# EAGLE board StepDrv (EAGLE 7.2.0)
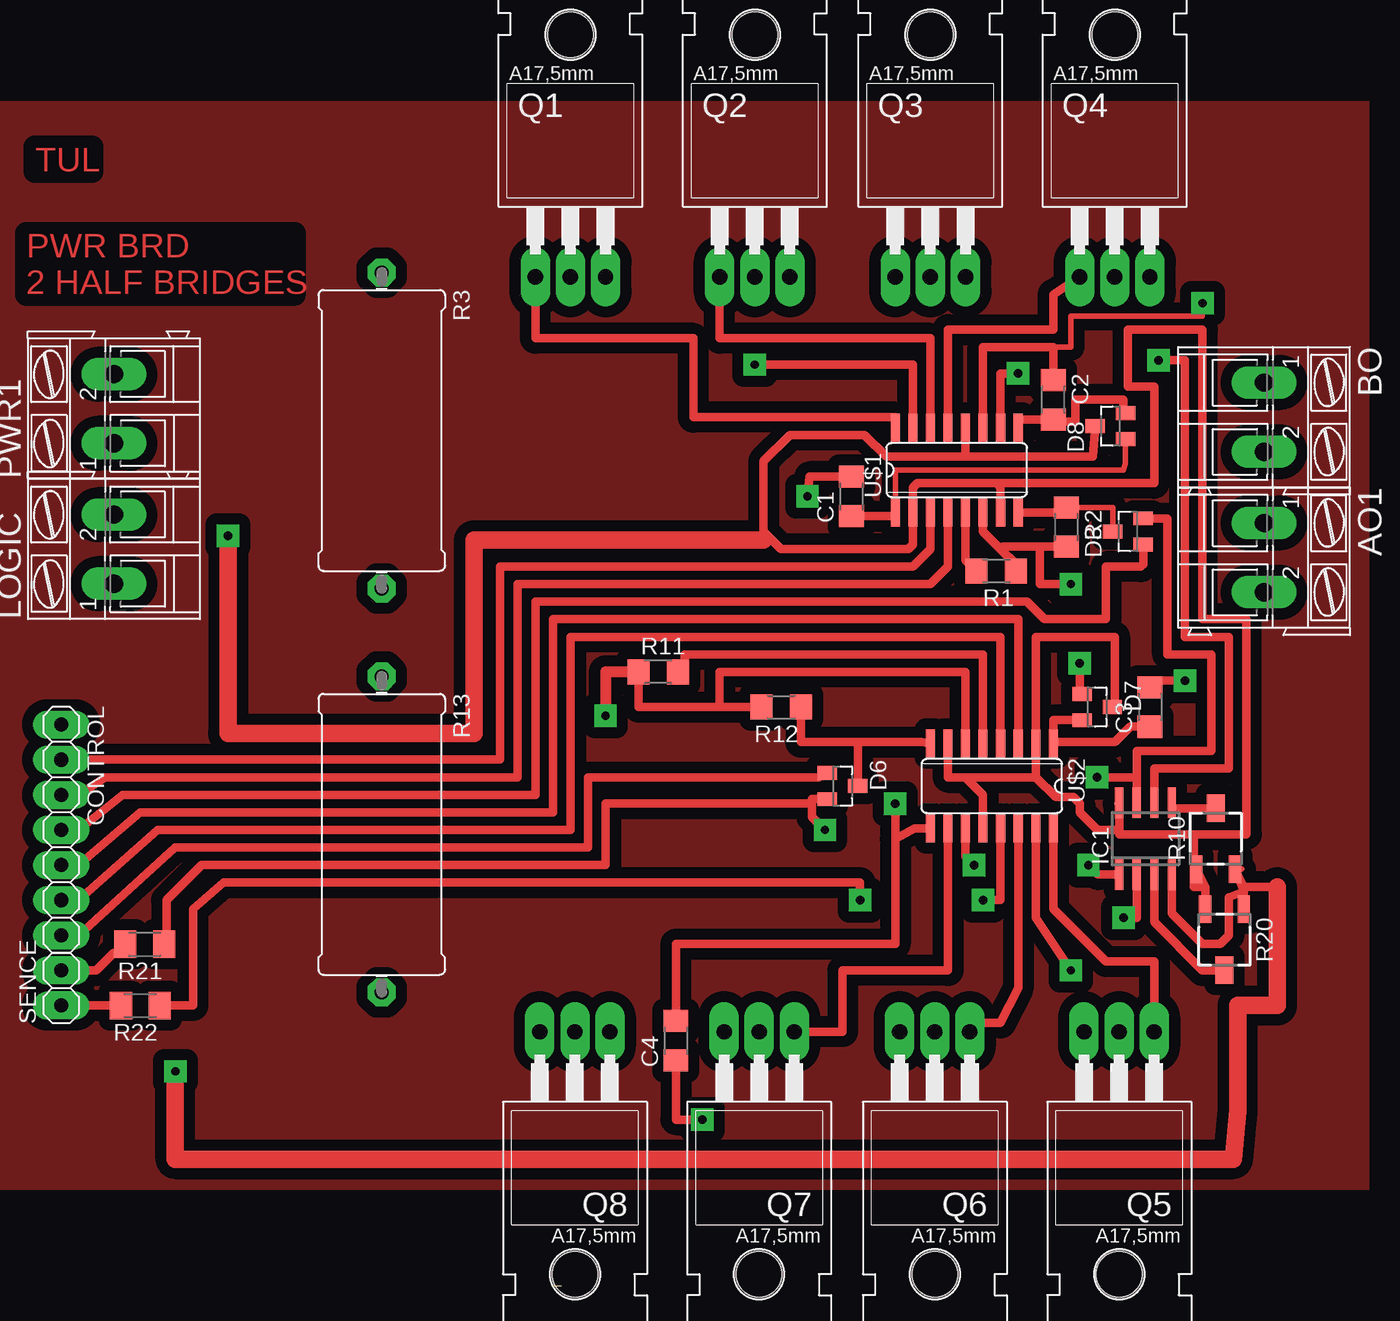
[diagram p0: board, top side]
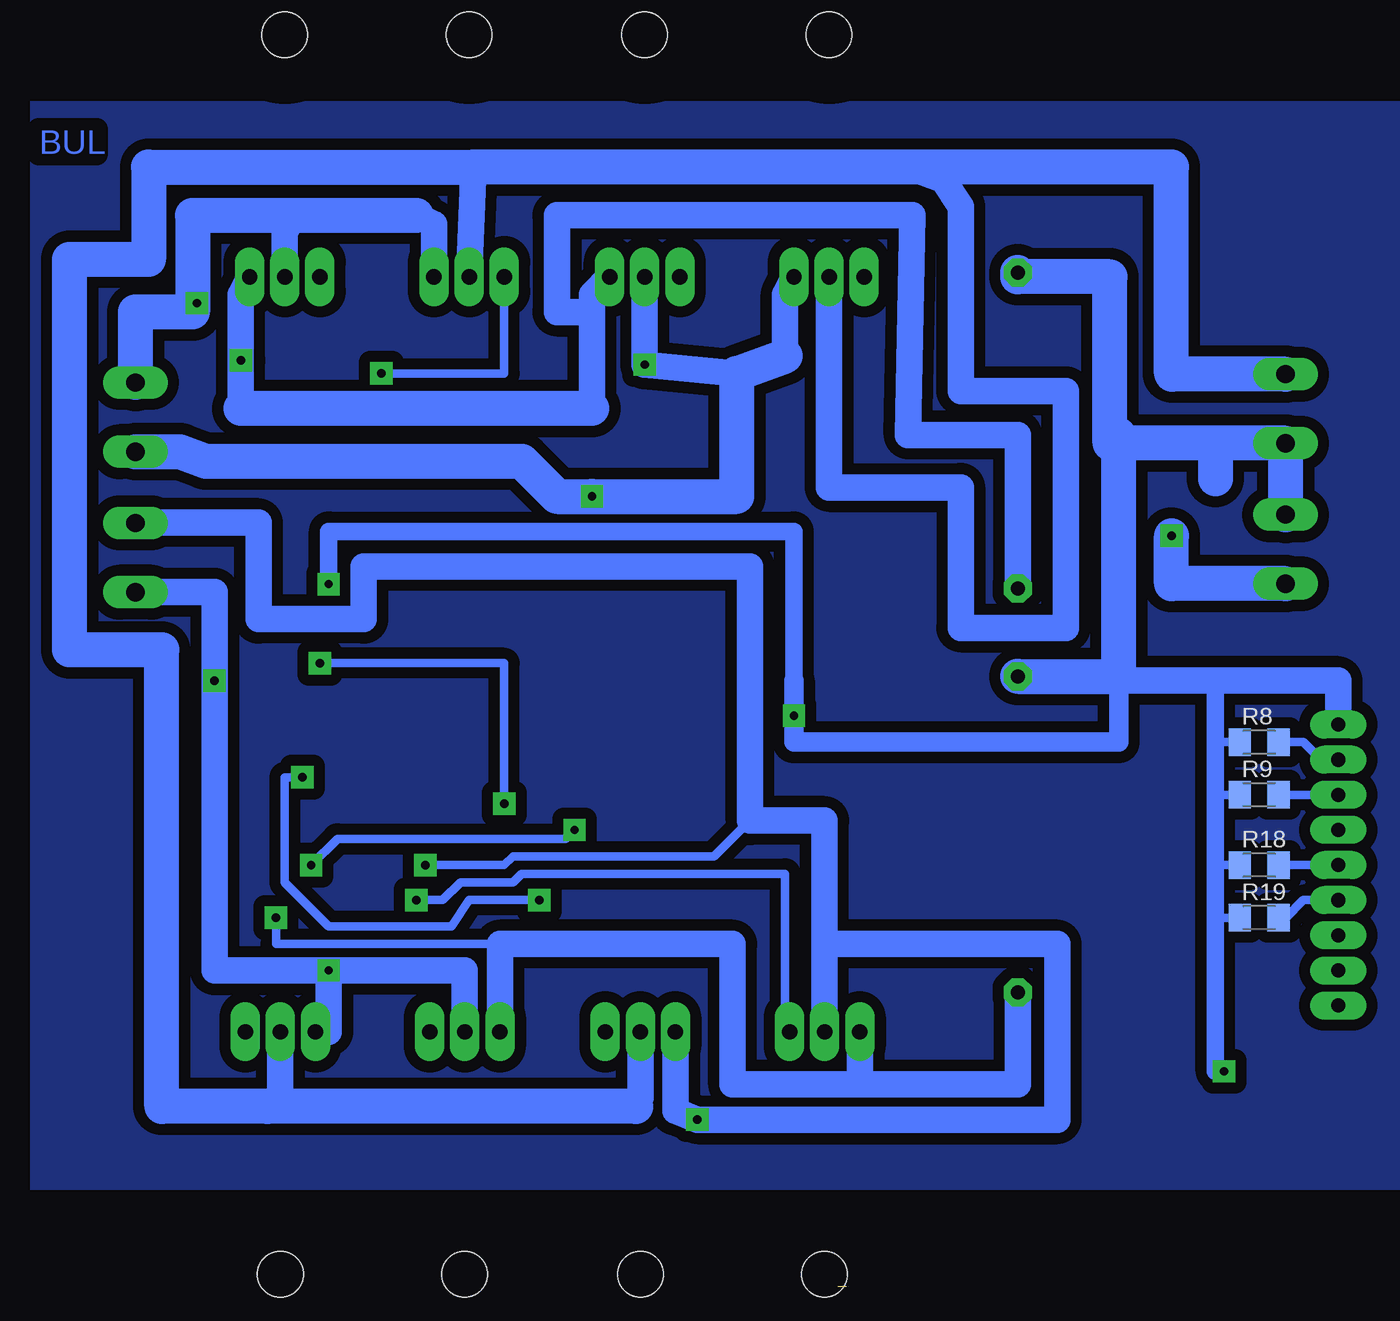
[diagram p1: board, bottom side, seen from below]

Size 0.63 x 0 mm. Coordinates in mm from the lower left corner, seen from the top.
Outline: 0.63,0 0,0
Copper layers (1*16): Top 0.035mm / dielectric 1.5mm / Bottom 0.035mm
Design rules "default *": minimum track width 10mil, minimum drill 24mil, track to track 8mil, track to pad 8mil, pad to pad 8mil, via to via 8mil, smd to smd 8mil, copper to edge 40mil, drill to drill 8mil, minimum pad ring 20mil, minimum via ring 20mil, stop-mask expansion 4mil, vias tented up to drill 0mil, thermal gap 10mil

## Footprints (pad centres in the part's own frame; a part is rotated, then mirrored left to right if it is on the bottom)
AK300/2 = drill 1.321 long: 1 -2.515,0; 2 2.489,0
C1206 = smd 1.6 x 1.803: 1 -1.422,0; 2 1.422,0
1X07 = drill 1.016 long: 1 -7.62,0; 2 -5.08,0; 3 -2.54,0; 4 0,0; 5 2.54,0; 6 5.08,0; 7 7.62,0
SOT23 = smd 1 x 1.4: 1 -0.95,-1.1; 2 0.95,-1.1; 3 0,1.1
SO08 = smd 0.6 x 2.2: 1 -1.905,-2.6; 2 -0.635,-2.6; 3 0.635,-2.6; 4 1.905,-2.6; 5 1.905,2.6; 6 0.635,2.6; 7 -0.635,2.6; 8 -1.905,2.6
TO220BH = drill 1.118 long: D 0,-6.35; G -2.54,-6.35; S 2.54,-6.35 | hole 3.302: 0,11.176
R1206 = smd 1.6 x 1.803: 1 -1.422,0; 2 1.422,0
0922/22 = drill 1.016 octagon: 1 -11.43,0; 2 11.43,0
M1206 = smd 1.6 x 2: 1 -1.4,0; 2 1.4,0
3223G = smd 2 x 0.9: 1 -2.2,1.4; 3 -2.2,-1.4 | smd 2 x 1.3: 2 2.2,0
1X02 = drill 1.016 long: 1 -1.27,0; 2 1.27,0
SO16 = smd 0.66 x 2.032: 1 -4.445,-3.073; 2 -3.175,-3.073; 3 -1.905,-3.073; 4 -0.635,-3.073; 5 0.635,-3.073; 6 1.905,-3.073; 7 3.175,-3.073; 8 4.445,-3.073; 9 4.445,3.073; 10 3.175,3.073; 11 1.905,3.073; 12 0.635,3.073; 13 -0.635,3.073; 14 -1.905,3.073; 15 -3.175,3.073; 16 -4.445,3.073

## Placement (x,y rotation side)
AO1  OUT  [AK300/2]  51.43,52.7 270 top  (outside the outline)
BO  OUT  [AK300/2]  51.43,62.87 270 top  (outside the outline)
C1  2.2uF  [C1206]  21.59,57.15 90 top  (outside the outline)
C2  2.2uF  [C1206]  36.2,64.14 270 top  (outside the outline)
C3  2.2uF  [C1206]  43.18,41.91 90 top  (outside the outline)
C4  2.2uF  [C1206]  8.89,17.78 90 top  (outside the outline)
CONTROL  [1X07]  -35.56,33.02 270 top  (outside the outline)
D3  HSMS-2854  [SOT23]  41.59,54.61 90 top  (outside the outline)
D6  HSMS-2854  [SOT23]  20.95,36.2 270 top  (outside the outline)
D7  HSMS-2853  [SOT23]  39.37,41.91 270 top  (outside the outline)
D8  HSMS-2853  [SOT23]  40.32,62.23 90 top  (outside the outline)
IC1  LM358D  [SO08]  42.86,32.38 0 top  (outside the outline)
LOGIC  12V  [AK300/2]  -31.75,53.34 90 top  (outside the outline)
PWR1  [AK300/2]  -31.75,63.5 90 top  (outside the outline)
Q1  IRFZ48Z  [TO220BH]  1.27,79.38 0 top  (outside the outline)
Q2  IRFZ48Z  [TO220BH]  14.6,79.38 0 top  (outside the outline)
Q3  IRFZ48Z  [TO220BH]  27.3,79.38 0 top  (outside the outline)
Q4  IRFZ48Z  [TO220BH]  40.64,79.38 0 top  (outside the outline)
Q5  IRFZ48Z  [TO220BH]  40.96,12.07 180 top  (outside the outline)
Q6  IRFZ48Z  [TO220BH]  27.62,12.07 180 top  (outside the outline)
Q7  IRFZ48Z  [TO220BH]  14.92,12.07 180 top  (outside the outline)
Q8  IRFZ48Z  [TO220BH]  1.59,12.07 180 top
R1  [R1206]  32.07,51.75 180 top  (outside the outline)
R2  [R1206]  37.15,54.93 270 top  (outside the outline)
R3  [0922/22]  -12.38,61.91 270 top  (outside the outline)
R8  [M1206]  -29.85,39.37 0 bottom  (outside the outline)
R9  [M1206]  -29.85,35.56 0 bottom  (outside the outline)
R10  [3223G]  47.94,32.38 90 top  (outside the outline)
R11  [R1206]  7.62,44.45 0 top  (outside the outline)
R12  [R1206]  16.51,41.91 180 top  (outside the outline)
R13  [0922/22]  -12.38,32.7 270 top  (outside the outline)
R18  [M1206]  -29.85,30.48 0 bottom  (outside the outline)
R19  [M1206]  -29.85,26.67 0 bottom  (outside the outline)
R20  [3223G]  48.58,25.08 270 top  (outside the outline)
R21  [M1206]  -29.53,24.77 180 top  (outside the outline)
R22  [M1206]  -29.85,20.32 180 top  (outside the outline)
SENCE  [1X02]  -35.56,21.59 90 top  (outside the outline)
U$1  HIP4082IBZT  [SO16]  29.21,59.05 0 top  (outside the outline)
U$2  HIP4082IBZT  [SO16]  31.75,36.2 180 top  (outside the outline)

## Library data of the parts
AO1 BO LOGIC PWR1 = con-ptr500; OC_FARNELL: unknown; OC_NEWARK: unknown
C1-C4 = dp_devices
CONTROL SENCE = pinhead
D3 D6-D8 = avago
IC1 = linear
Q1-Q8 = transistor-power
R1-R3 R8 R9 R11-R13 R18 R19 R21 R22 = rcl
R10 R20 = pot
U$1 U$2 = mosfet_drivers

## Nets
N$1: C2.2 D8.2 U$1.9
N$2: D3.3 R2.1 U$1.8
N$3: C1.1 D8.1 U$1.1
N$4: BO.2 C1.2 Q1.S Q2.D U$1.15
N$5: CONTROL.4 D3.1
N$6: R1.2 U$1.5
N$7: R21.2 SENCE.2
N$8: BO.1 C2.1 Q3.S Q4.D U$1.11
N$9: CONTROL.3 R9.2 U$1.4
N$10: CONTROL.2 R8.2 U$1.3
N$11: IC1.6 Q2.S Q4.S R3.2
N$12: Q1.G U$1.16
N$13: Q2.G U$1.14
N$14: Q3.G U$1.10
N$15: Q4.G U$1.13
N$16: D3.2 IC1.7 R22.1
N$18: IC1.5 R10.2
N$19: C4.2 D7.1 U$2.9
N$20: C3.1 D7.2 U$2.1
N$21: AO1.2 C3.2 Q5.S Q6.D U$2.15
N$23: CONTROL.7 D6.1
N$24: R11.2 U$2.5
N$25: AO1.1 C4.1 Q7.S Q8.D U$2.11
N$26: IC1.2 Q6.S Q8.S R13.2
N$27: Q5.G U$2.16
N$28: Q6.G U$2.14
N$29: Q7.G U$2.10
N$30: Q8.G U$2.13
N$31: CONTROL.6 R19.2 U$2.4
N$32: CONTROL.5 R18.2 U$2.3
N$33: R22.2 SENCE.1
N$34: D6.3 R12.1 U$2.8
N$35: D6.2 IC1.1 R21.1
N$36: IC1.3 R20.2
N$37: PWR1.2 Q1.D Q3.D Q5.D Q7.D
N$38: CONTROL.1 IC1.4 LOGIC.2 PWR1.1 R1.1 R2.2 R3.1 R8.1 R9.1 R10.3 R11.1 R12.2 R13.1 R18.1 R19.1 R20.1 U$1.6 U$2.6
N$39: D7.3 D8.3 IC1.8 LOGIC.1 R10.1 R20.3 U$1.2 U$1.7 U$1.12 U$2.2 U$2.7 U$2.12

## Tracks (layer width: path | path; a pad name or v marks a point on that pad's centre or on a via)
N$1
  Top 0.61: U$1.9 33.66,62.71 C2.2 36.2,62.55 37.78,62.55 37.78,64.14 41.27,64.14 41.27,63.18 D8.2
N$2
  Top 0.406: D3.3 40.49,56.35 R2.1
  Top 0.61: U$1.8 36.78,55.98 R2.1
N$3
  Top 0.406: D8.1 41.42,59.52 41.27,59.05 24.77,59.05 U$1.1
  Top 0.61: C1.1 24.51,55.73 U$1.1
N$4  (via drill 0.6)
  Top 0.61: U$1.15 26.03,66.67 v14.6,66.67 | C1.2 18.57,58.57 v18.41,57.15
  Bottom 1.93: 4.45,67.31 4.45,71.75 Q1.S | Q2.D v14.6,66.67 7.94,66.04
  Bottom 2.54: BO.2 48.21,60.38 46.35,59.69 23.49,59.69 20.95,57.15 v18.41,57.15 7.94,57.15 7.94,66.04 4.45,67.31
N$5
  Top 0.61: D3.1 42.69,52.22 42.54,52.07 40,52.07 40,48.26 35.56,48.26 34.29,49.53 -1.27,49.53 -1.27,35.56 -31.12,35.56 -34.29,33.02 CONTROL.4
N$6
  Top 0.61: U$1.5 29.84,52.55 R1.2
N$7
  Top 0.61: SENCE.2 -33.02,22.86 -31.75,24.13 -30.61,24.13 R21.2
N$8  (via drill 0.6)
  Top 0.406: 36.2,67.95 37.46,67.95 37.46,70.17 46.99,70.17 v46.99,71.12
  Top 0.61: U$1.11 31.12,67.95 36.2,67.95 C2.1
  Bottom 0.406: v46.99,71.12 47.62,71.12 48.26,70.48
  Bottom 1.93: 31.12,77.47 29.84,76.83 Q3.S | Q4.D 40.64,76.2 40,77.47
  Bottom 2.54: 31.12,77.47 40,77.47 47.31,77.47 47.31,70.48 48.26,70.48 51.43,70.48 BO.1
N$9
  Top 0.61: U$1.4 28.57,52.07 27.3,50.8 -2.54,50.8 -2.54,36.83 -32.39,36.83 -34.29,35.56 CONTROL.3
  Bottom 0.61: CONTROL.3 R9.2
N$10
  Top 0.61: U$1.3 27.3,53.34 26.03,52.07 -3.81,52.07 -3.81,38.1 CONTROL.2
  Bottom 0.61: CONTROL.2 -34.29,38.1 -33.02,39.37 R8.2
N$11  (via drill 0.6)
  Top 0.61: IC1.6 43.5,37.47 48.9,37.47 48.9,46.99 45.72,46.99 45.72,66.99 v43.82,66.99
  Bottom 1.93: 43.82,63.5 v43.82,66.99 43.82,71.75 Q4.S | 18.41,63.5 18.41,70.48 | 18.41,70.48 18.41,71.75 Q2.S | R3.2 -12.38,61.59 -4.45,61.59 -4.76,77.47 20.95,77.47 20.95,70.48 18.41,70.48
  Bottom 2.54: 18.41,63.5 43.82,63.5
N$12
  Top 0.61: U$1.16 24.77,62.87 10.16,62.87 10.16,68.58 -1.27,68.58 Q1.G
N$13
  Top 0.61: U$1.14 27.3,68.58 12.06,68.58 Q2.G
N$14  (via drill 0.6)
  Top 0.61: U$1.10 32.38,66.04 v33.66,66.04
  Bottom 0.61: v33.66,66.04 24.77,66.04 Q3.G
N$15
  Top 0.61: Q4.G 36.2,71.75 36.2,69.22 28.57,69.22 U$1.13
N$16  (via drill 0.6)
  Top 0.61: IC1.7 42.23,36.83 | D3.2 44.45,55.56 44.45,45.72 47.62,45.72 47.62,38.73 42.23,38.73 42.23,36.83 | R22.1 -26.04,20.32 -26.04,27.3 -23.81,29.21 22.23,29.21 v22.23,27.94 | v39.37,36.83 42.23,36.83
  Bottom 0.61: v22.23,27.94 27.3,27.94 28.57,26.04 37.46,26.04 40.64,29.21 40.64,36.83 v39.37,36.83
N$18
  Top 0.61: R10.2 44.77,34.59 IC1.5
N$19  (via drill 0.6)
  Top 0.61: C4.2 8.89,24.77 24.77,24.77 24.77,32.38 | U$2.9 26.14,33.12 24.77,32.38 | D7.1 38.1,42.86 v38.1,45.09 | v24.77,34.93 24.77,32.38
  Bottom 0.61: v24.77,34.93 24.77,45.09 v38.1,45.09
N$20
  Top 0.61: D7.2 36.2,40.96 U$2.1 36.3,39.37 40.64,39.37 41.76,40.49 C3.1
N$21  (via drill 0.6)
  Top 0.61: U$2.15 34.92,26.67 v37.46,22.86 | C3.2 43.18,43.81 v45.72,43.81
  Bottom 1.93: Q6.D 27.62,22.86 v37.46,22.86 | v37.46,22.86 37.46,18.41 Q5.S | v37.46,22.86 45.72,22.86 v45.72,43.81 45.72,50.22 AO1.2
N$22
  pour Top (isolate 0.813): -40.01,6.99 59.05,6.99 59.05,85.72 -40.01,85.72
N$23
  Top 0.61: D6.1 19.22,36.83 2.54,36.83 2.54,31.75 -27.3,31.75 -34.29,25.4 CONTROL.7
N$24
  Top 0.61: U$2.5 31.12,45.72 9.52,45.72 9.52,45.09 R11.2
N$25  (via drill 0.6)
  Top 0.61: U$2.11 29.84,31.11 v30.48,30.48 | C4.1 8.89,12.07 v10.8,12.07
  Bottom 0.61: v30.48,30.48 24.77,30.48 24.13,31.11 9.58,31.11 6.98,33.71
  Bottom 1.93: Q8.D 1.59,24.77 | 1.59,24.77 1.59,33.71 6.98,33.71 6.98,52.07 34.92,52.07 34.92,48.26 42.54,48.26 42.54,55.24 51.43,55.24 AO1.1 | Q7.S 12.38,12.7 v10.8,12.07 -15.24,12.07 -15.24,24.77 1.59,24.77
N$26  (via drill 0.6)
  Top 0.61: IC1.2 42.23,26.67 v41.27,26.67
  Bottom 0.61: v41.27,26.67 41.27,24.77 25.08,24.77
  Bottom 1.93: Q8.S -0.95,14.61 | -0.95,14.61 8.25,14.61 8.25,24.77 25.08,24.77 Q6.S | R13.2 -12.38,14.61 -0.95,14.61
N$27
  Top 0.61: U$2.16 36.2,27.3 40,23.5 43.5,23.5 Q5.G
N$28
  Top 0.61: U$2.14 33.66,21.59 32.38,19.05 30.8,19.05 Q6.G
N$29
  Top 0.61: U$2.10 28.57,22.86 20.95,22.86 20.95,18.41 Q7.G
N$30  (via drill 0.6)
  Top 0.61: 3.94,18.41 Q8.G | U$2.13 32.38,27.94 v31.12,27.94
  Bottom 0.61: Q8.G 4.45,18.41 4.45,29.84 23.49,29.84 24.13,29.21 27.94,29.21 29.21,27.94 v31.12,27.94
N$31
  Top 0.61: U$2.4 32.38,46.99 1.27,46.99 1.27,33.02 -28.58,33.02 -34.29,27.94 CONTROL.6
  Bottom 0.61: CONTROL.6 -33.02,27.94 -31.75,26.67 R19.2
N$32
  Top 0.61: U$2.3 33.66,48.26 0,48.26 0,34.29 -29.85,34.29 -34.29,30.48 CONTROL.5
  Bottom 0.61: CONTROL.5 R18.2
N$33
  Top 0.61: SENCE.1 R22.2
N$34
  Top 0.61: U$2.8 26.67,39.37 22.05,39.37 | R12.1 17.93,39.37 22.05,39.37 | D6.3 22.05,39.37
N$35  (via drill 0.6)
  Top 0.61: D6.2 18.73,35.25 18.73,35.24 18.73,34.93 | R21.1 -27.94,24.95 -27.94,27.94 -25.4,30.48 3.81,30.48 3.81,34.93 18.73,34.93 | IC1.1 39.43,29.79 v38.73,30.48 | v19.68,33.02 18.73,33.97 18.73,34.93
  Bottom 0.61: v38.73,30.48 36.83,32.38 20.32,32.38 v19.68,33.02
N$36
  Top 0.61: IC1.3 43.5,26.35 46.99,22.86 48.55,22.86 R20.2
N$37
  Bottom 1.93: Q3.D 26.99,80.96 | 15.24,13.02 14.92,13.65 Q7.D | Q5.D 40.96,13.34 41.91,13.02 | Q1.D 1.27,57.78 -8.26,57.78 -8.26,47.62 -15.88,47.62 -15.88,64.77 -8.26,64.77 -8.26,78.11 -6.99,80.01 -4.45,80.96
  Bottom 2.54: PWR1.2 -23.55,65.99 -23.5,66.04 -23.5,80.96 -4.45,80.96 26.99,80.96 50.48,80.96 50.48,74.3 56.2,74.3 56.2,46.04 49.53,46.04 49.53,13.02 41.91,13.02 15.24,13.02
N$38  (via drill 0.6)
  Top 0.406: 49.85,30.18 R10.3 | 49.85,27.28 R20.1
  Top 0.61: R1.1 33.49,52.24 32.38,53.34 | 32.38,53.34 31.12,54.61 U$1.6 | R2.2 35.24,53.51 | 35.24,53.51 32.55,53.51 32.38,53.34 | 35.24,53.51 35.24,50.8 v37.46,50.8 | U$2.6 29.84,44.45 12.06,44.45 12.06,41.91 | 12.06,41.91 R12.2 | 52.39,28.89 49.98,28.89 R10.3 49.98,28.57 | 49.98,28.57 R20.1 | IC1.4 44.77,26.99 46.99,24.77 48.26,24.77 48.9,25.4 48.9,28.13 49.98,28.57 | R11.1 6.2,41.91 12.06,41.91
  Top 0.813: R11.1 3.81,44.45 v3.81,41.27
  Top 1.27: v-27.3,15.56 -27.3,9.21 49.21,9.21 49.53,12.7 49.53,20.32 52.39,20.32 52.39,28.89
  Bottom 0.61: -28.45,39.22 R8.1 -26.67,39.37 | R9.1 -26.67,35.56 | R18.1 -26.67,30.48 | R19.1 -26.67,26.67
  Bottom 1.27: v37.46,50.8 37.46,54.61 3.81,54.61 3.81,43.81 | -26.67,43.81 -26.67,39.37 -26.67,35.56 -26.67,30.48 -26.67,26.67 -26.67,15.56 v-27.3,15.56
  Bottom 1.422: 3.81,43.81 v3.81,41.27 3.81,39.37 -19.69,39.37 -19.69,44.45
  Bottom 1.778: -12.38,73.66 R3.1
  Bottom 1.93: CONTROL.1 -35.56,43.81 -26.67,43.81 -19.05,43.81 -19.05,44.13
  Bottom 2.54: -26.67,60.98 PWR1.1 LOGIC.2 | -26.67,60.98 -26.67,58.42 | -26.67,60.98 -19.05,60.98 -19.05,61.59 | -19.05,61.59 -19.05,73.03 -12.38,73.03 R3.1 | R13.1 -19.05,44.13 -19.69,44.13 -19.69,44.45 -19.69,61.59 -19.05,61.59
N$39  (via drill 0.6)
  Top 0.61: U$1.7 32.38,57.78 32.07,58.1 | 32.07,58.1 26.35,58.1 26.03,57.78 U$1.2 26.03,53.66 25.72,53.34 16.51,53.34 15.24,54.61 | D8.3 39.05,60.01 29.84,60.01 | 29.84,60.01 24.13,60.01 22.54,61.59 17.14,61.59 15.24,59.69 15.24,54.61 | U$1.12 29.84,60.01 | U$2.7 28.57,36.83 29.84,36.83 | 29.84,36.83 34.92,36.83 | 34.92,36.83 U$2.2 34.92,46.99 40.64,46.99 40.64,41.91 D7.3 | R10.1 47.18,28.89 | 47.18,28.89 R20.3 | 40.96,33.02 IC1.8 40.9,34.93 | 40.96,33.02 40.96,32.7 46.35,32.7 | 47.18,28.89 46.35,28.89 46.35,32.7 | 34.92,36.83 36.37,35.39 37.63,35.39 38.1,34.93 38.1,34.29 39.37,33.02 40.96,33.02 | 29.84,36.83 31.12,35.56 U$2.12 | 46.35,32.7 50.16,32.7 50.16,48.26 46.99,48.26 46.99,69.22 41.59,69.22 41.59,65.09 43.5,65.09 43.5,58.1 32.07,58.1 | 15.24,53.98 15.24,54.61
  Top 1.27: v-23.5,54.29 -23.5,40.01 -5.71,40.01 -5.71,53.98 15.24,53.98
  Bottom 2.54: LOGIC.1 -23.5,50.83 v-23.5,54.29
N$40
  pour Bottom (isolate 0.813): -22.23,6.99 59.05,6.99 59.05,85.72 -40.01,85.72 -40.01,6.99

## Text on the board
Top: TUL | PWR BRD / 2 HALF BRIDGES
Bottom: BUL